# Altium PCB PWR_BOard_final.PcbDoc (part 1 of 2)
Units mm, origin at the board's own origin, x right, y up, seen from the top; angles counter-clockwise.
Board outline 72 x 52 mm, 2 copper layers (Top Layer, Bottom Layer); 122 components, 53 nets, 264 pads, 86 vias.
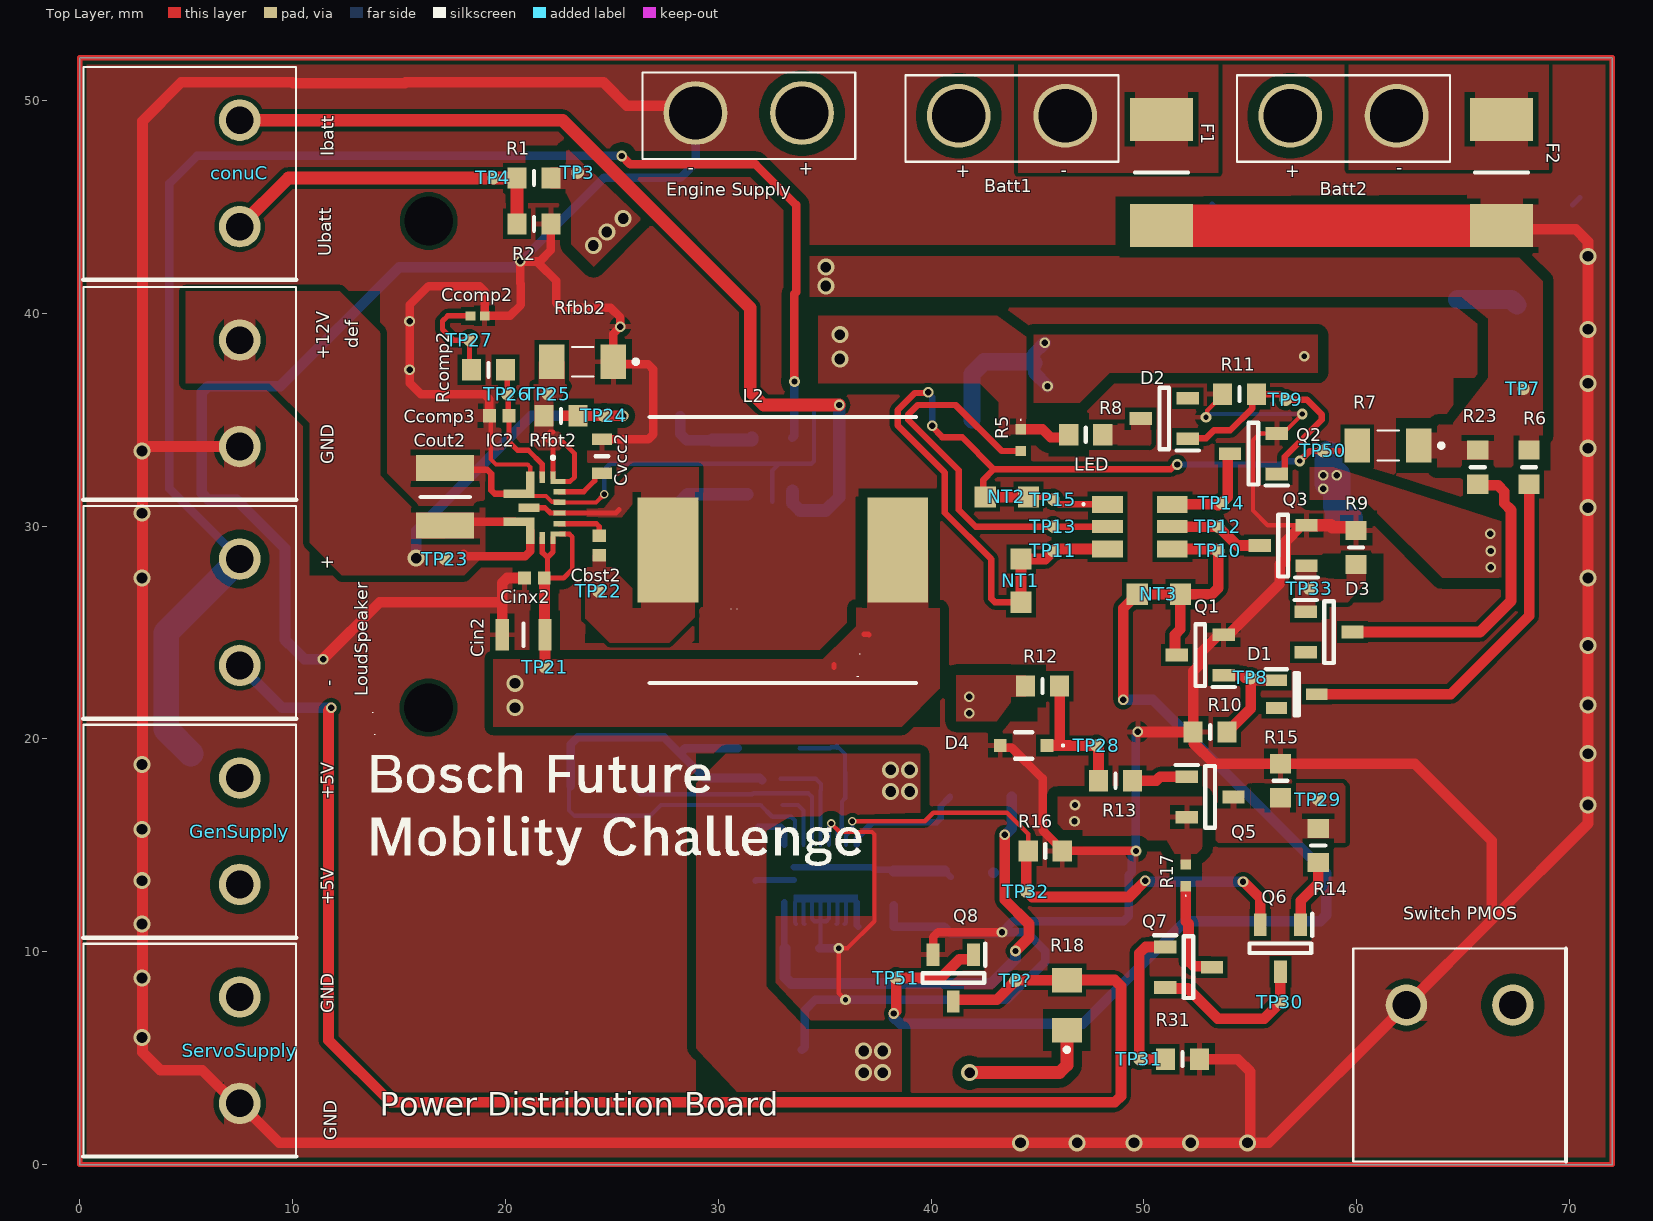
[diagram p0: Top Layer view]
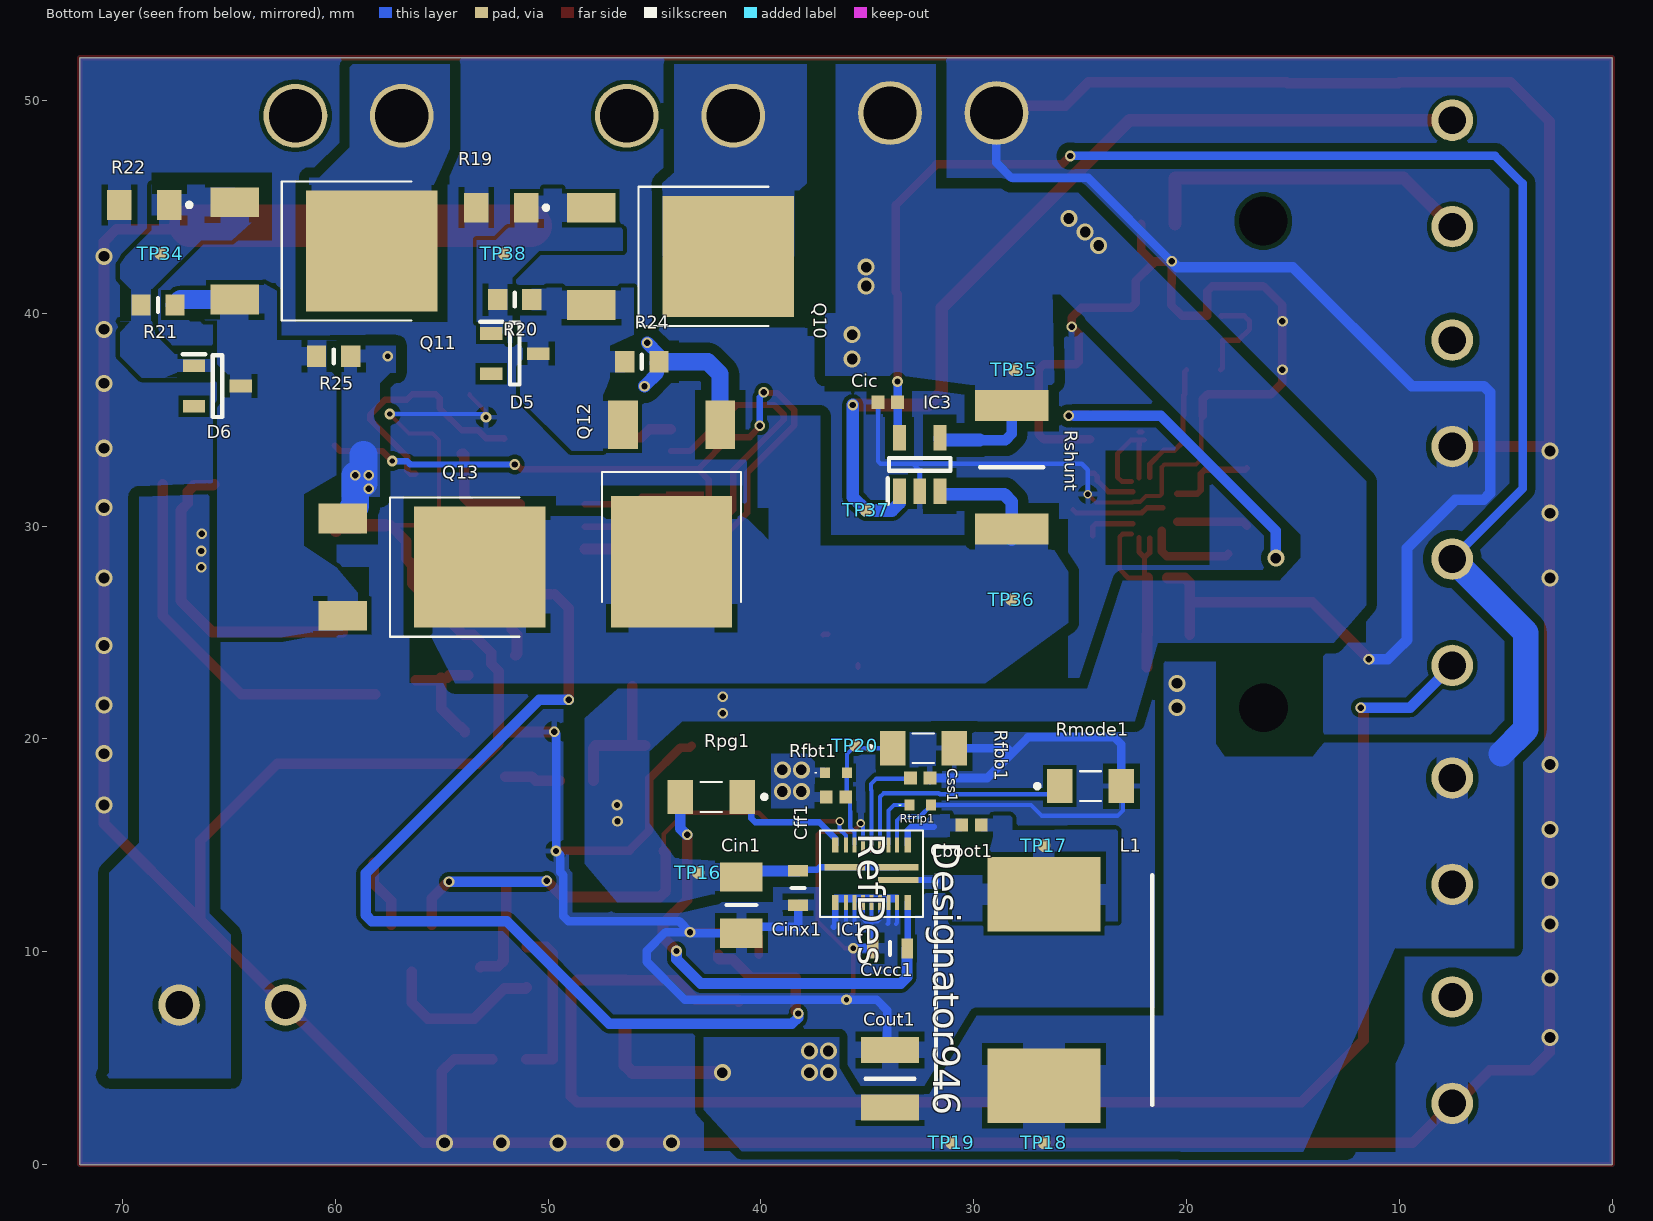
[diagram p1: Bottom Layer view, seen from below]
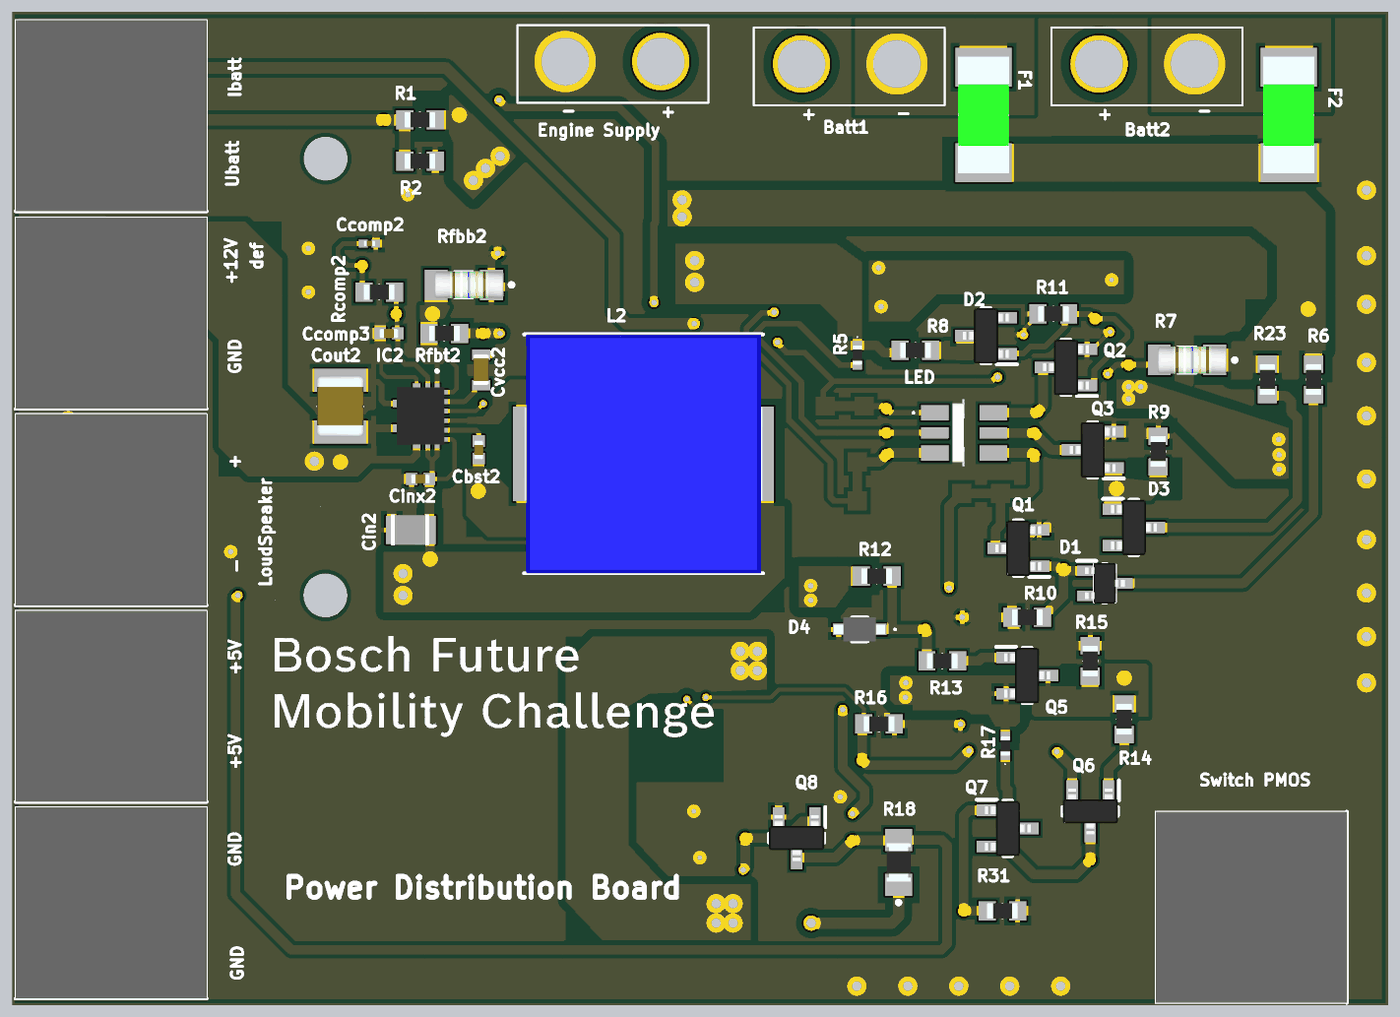
[diagram p3: 3D render of the assembled board from above, using the file's embedded part models]
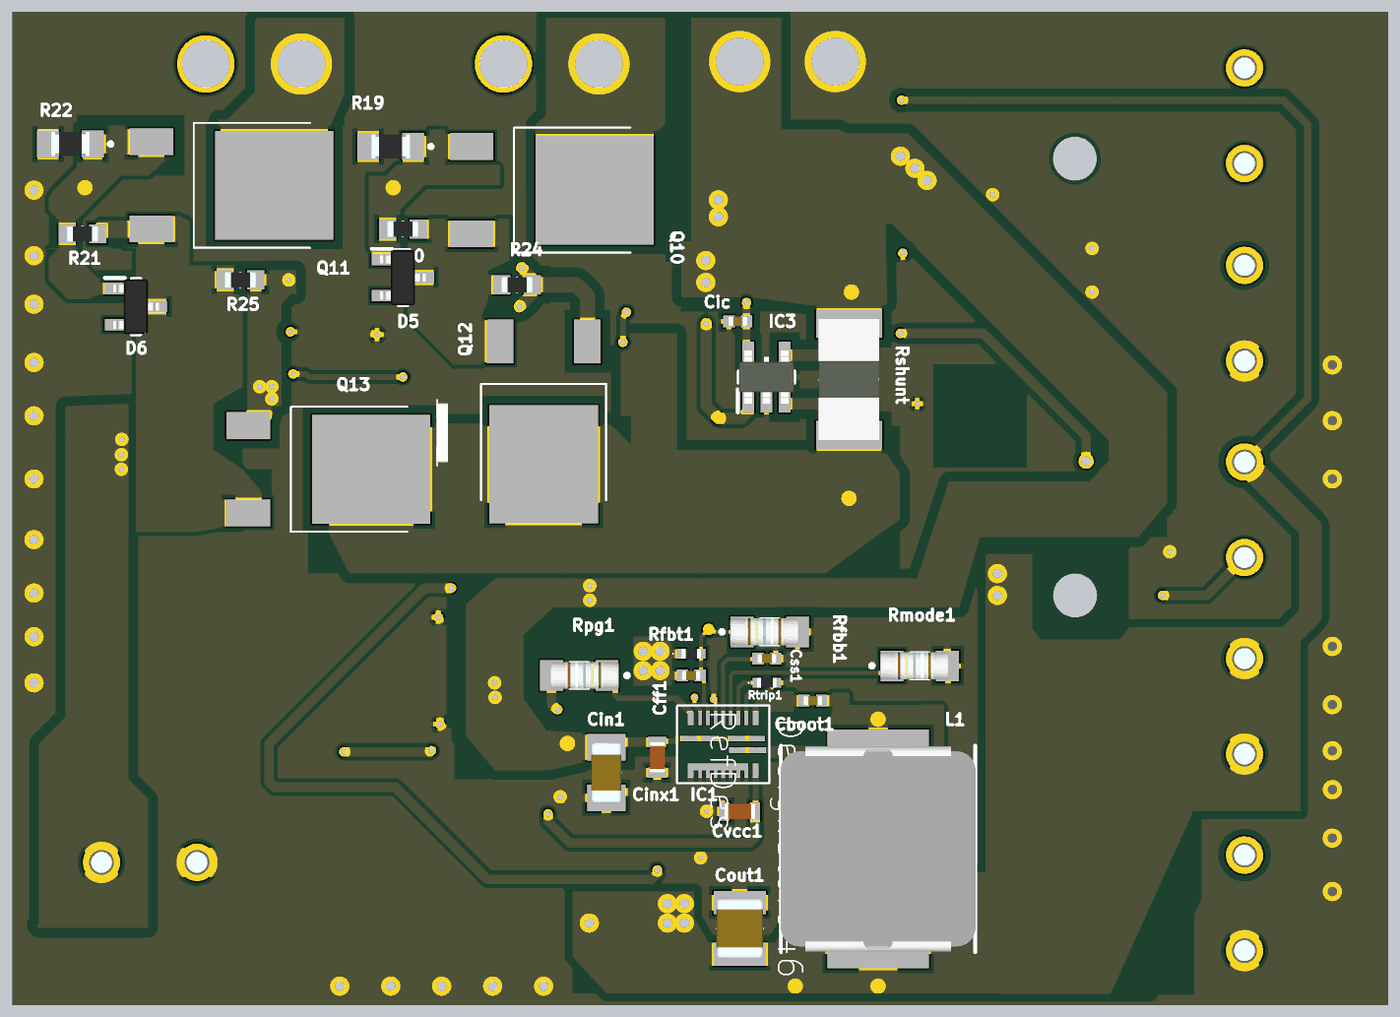
[diagram p4: 3D render of the assembled board from below, using the file's embedded part models]

## Layer stack, top to bottom
Top Solder: solder mask 0.0102, Solder Resist, Dk 3.5
Top Layer: signal copper 0.0356
Dielectric 1: dielectric 0.32, FR-4, Dk 4.8
Bottom Layer: signal copper 0.0356
Bottom Solder: solder mask 0.0102, Solder Resist, Dk 3.5

## Board outline
0,0 0,52 72,52 72,0

## Design rules (kind name [scope] priority, off if disabled: settings)
Clearance Clearance_5 [InNet('No Net')] p1: gap=2 ignorepadtopadclearanceinfootprint=FALSE
Clearance [InNet('out_Batt') vs InNet('GND')] p2: gap=0.5 ignorepadtopadclearanceinfootprint=FALSE except(0: Arc-Hole Track-Hole SMDPad-Hole THPad-Hole Via-Hole Fill-Hole Poly-Hole Region-Hole Text-Hole)
Clearance Clearance_6 [InNet('+5V') vs InNet('GND')] p3: gap=0.4 ignorepadtopadclearanceinfootprint=FALSE except(0: Arc-Hole Track-Hole SMDPad-Hole THPad-Hole Via-Hole Fill-Hole Poly-Hole Region-Hole Text-Hole)
Clearance Clearance_7 [InNet('Vout1') vs InNet('GND')] p4: gap=0.3 ignorepadtopadclearanceinfootprint=FALSE except(0: Arc-Hole Track-Hole SMDPad-Hole THPad-Hole Via-Hole Fill-Hole Poly-Hole Region-Hole Text-Hole)
Clearance Clearance_2 [InNet('Out_Batt1') vs InNet('GND')] p5: gap=0.5 ignorepadtopadclearanceinfootprint=FALSE except(0: Arc-Hole Track-Hole SMDPad-Hole THPad-Hole Via-Hole Fill-Hole Poly-Hole Region-Hole Text-Hole)
Clearance Clearance_3 [InNet('Out_Batt2') vs InNet('GND')] p6: gap=0.5 ignorepadtopadclearanceinfootprint=FALSE except(0: Arc-Hole Track-Hole SMDPad-Hole THPad-Hole Via-Hole Fill-Hole Poly-Hole Region-Hole Text-Hole)
Clearance Clearance_4 [InNet('Ubatt') vs InNet('GND')] p7: gap=0.5 ignorepadtopadclearanceinfootprint=FALSE except(0: Arc-Hole Track-Hole SMDPad-Hole THPad-Hole Via-Hole Fill-Hole Poly-Hole Region-Hole Text-Hole)
Clearance Clearance_8 [InNet('NetQ12_1') vs InNet('GND')] p8: gap=0.5 ignorepadtopadclearanceinfootprint=FALSE except(0: Arc-Hole Track-Hole SMDPad-Hole THPad-Hole Via-Hole Fill-Hole Poly-Hole Region-Hole Text-Hole)
Clearance Clearance_1 [All] p9: gap=0.2 ignorepadtopadclearanceinfootprint=FALSE except(0: Arc-Hole Track-Hole SMDPad-Hole THPad-Hole Via-Hole Fill-Hole Poly-Hole Region-Hole Text-Hole)
PolygonConnect [All] p1: connectstyle=Relief reliefconductorwidth=0.254 reliefentries=4 polygonreliefangle="90 Angle" airgapwidth=0.254
RoutingVias [All] p1: holewidth=0.3 width=0.5 viastyle="Through Hole" minholewidth=0.25 minwidth=0.4 maxholewidth=0.5 maxwidth=0.8
SolderMaskExpansion [All] p1: expansion=0.102 istentingtop=FALSE
UnpouredPolygon [All] p1: allowshelved=TRUE
Width [All] p1: maxlimit=5 minlimit=0.2 preferedwidth=0.6 minimp=50.000000 maximp=50.000000 favimp=50.000000
29 further rules are at their usual default settings.

## Classes and differential pairs
component class PWR_Board: +12V Batt1 Batt2 conuC D1 D2 D3 "Engine Supply" F1 F2 GenSupply LED NT1 NT2 NT3 Q1 Q2 Q3 R1 R2 R5 R6 R7 R8 R9 R10 R11 R23 ServoSupply TP3 TP4 TP7 TP8 TP9 TP10 TP11 TP12 TP13 TP14 TP15 TP33 TP50
component class circuit-On-Off+loudspeaker: D4 LoudSpeaker Q5 Q6 Q7 Q8 R12 R13 R14 R15 R16 R17 R18 R31 Sp TP28 TP29 TP30 TP31 TP32 TP51 TP?
component class buck_converter15A-5V: Cboot1 Cff1 Cin1 Cinx1 Cout1 Css1 Cvcc1 IC1 L1 Rfbb1 Rfbt1 Rmode1 Rpg1 Rtrip1 TP16 TP17 TP18 TP19 TP20
component class boost_converter_var2: Cbst2 Ccomp2 Ccomp3 Cin2 Cinx2 Cout2 Cvcc2 IC2 L2 Rcomp2 Rfbb2 Rfbt2 TP21 TP22 TP23 TP24 TP25 TP26 TP27
component class Balance_batt_protection: Cic D5 D6 IC3 Q10 Q11 Q12 Q13 R19 R20 R21 R22 R24 R25 Rshunt "Switch PMOS" TP34 TP35 TP36 TP37 TP38

## Components (designator, comment, footprint, x,y, rotation, side; value= is the part's Value field where it differs from the comment)
+12V "6.1V-7.4V" TB002V50002BE#1 7.516,33.735 r90 top (schematic designator BrainSupply)
Batt1 "7.4V" "PCBComponent_1 - duplicate" 46.298,49.276 r180 top
Batt2 "7.4V" "PCBComponent_1 - duplicate" 61.872,49.276 r180 top
Cboot1 "EMK105 B7104KVHF" CAPC1005X55N 30.104,15.957 r180 bottom value=100nF
Cbst2 "EMK105 B7104KVHF" CAPC1005X55N 24.407,29.083 r90 top value=100nF
Ccomp2 "GCM155R71E333K" CAPC0603X33N 18.692,39.878 r0 top value=39nF
Ccomp3 "GCM1555C1H820J*" CAPC1005X55N 19.708,35.179 r180 top value=82pF
Cff1 "C1005C0G1H220J" CAPC1005X55N 36.472,17.272 r180 bottom
Cic "C2012X7S1C106K" CAPC1005X55N 34.036,35.814 r0 bottom value="100 nF"
Cin1 "GCJ31CC71E106K" CAPC3216X200N 40.917,12.192 r270 bottom value=10uF
Cin2 "C2012X7S1C106K" CAPC2012X145N 20.851,24.892 r180 top value=10uF
Cinx1 "GCM188C71A225K" CAPC1608X80N 38.25,12.992 r270 bottom value=2.2uF
Cinx2 "EMK105 B7104KVHF" CAPC1005X55N 21.359,27.559 r180 top value=100nF
conuC "6.1V-7.4V" TB002V50002BE#1 7.516,44.069 r90 top
Cout1 "EMK325ABJ107MM-T" CAPC3225X270N 33.932,4.035 r90 bottom value=100uF
Cout2 "CKG57KX7R1E476K" CAPC3225X270N 17.168,31.369 r90 top value=47uF
Css1 "C1608X7R1H154K" CAPC1005X55N 32.512,18.161 r180 bottom value=120nF
Cvcc1 "GCM188C71A225K" CAPC1608X80N 33.932,10.16 r0 bottom value=2.2uF
Cvcc2 "GCM188C71A225K" CAPC1608X80N 24.534,33.274 r90 top value=2.2uF
D1 "Vbr=6V2" SOT65P210X110-3N 57.173,22.098 r0 top
D2 "BZX84W-C15F" SOT95P230X110-3N 50.95,35.052 r180 top
D3 "Vbr=6V2" SOT95P230X110-3N 58.697,25.019 r0 top
D4 "PZU6.2B2A-QX" PZU62B2AQX 44.346,19.685 r180 top
D5 "SZBZX84C18ET1G" SOT95P230X110-3N 51.562,38.1 r180 bottom
D6 "SZBZX84C18ET1G" SOT95P230X110-3N 65.532,36.576 r180 bottom
"Engine Supply" "7.4V" "PCBComponent_1 - duplicate" 33.932,49.403 r180 top
F1 "0451015.MRL" FUSC6127X294N 50.823,46.609 r270 top
F2 "0451015.MRL" FUSC6127X294N 66.802,46.609 r270 top
GenSupply "6.1V-7.4V" TB002V50002BE#1 7.516,13.161 r90 top
IC1 "TPS548A28RWWR" RWW0021A 34.801,13.67 r270 bottom value=Value
IC2 "TPS61288RQQR" TPS61288RQQR 21.359,30.861 r270 top
IC3 "INA180A2QDBVRQ1" SOT95P280X145-5N 32.535,32.893 r90 bottom
L1 "IHLP4040DZERR47M11" IHLP4040DZERR47M11 26.693,8.2 r90 bottom value=470nH
L2 "DR127-3R3-R" INDPM125125X800N 33.034,28.873 r180 top value=3.3uH
LED "SMLVN6RGB1U1" SMLVN6RGB1U1 49.807,29.972 r90 top
LoudSpeaker "5V" TB002V50002BE#1 7.516,23.448 r90 top
NT1 "NT" NetTie 44.219,27.432 r270 top net-tie
NT2 "NT" NetTie 43.561,31.369 r0 top net-tie
NT3 "NT" NetTie 50.696,26.797 r180 top net-tie
Q1 "BC846B" SOT95P230X110-3N 52.644,23.937 r180 top
Q2 "BC846B" SOT95P230X110-3N 55.141,33.401 r180 top
Q3 "BC846B" SOT95P230X110-3N 56.538,29.083 r180 top
Q5 "BC856B" SOT95P230X110-3N 53.109,17.272 r0 top
Q6 "BC846B" SOT95P230X110-3N 56.411,10.16 r270 top
Q7 "BSS138BK-215" SOT95P230X110-3N 52.093,9.271 r0 top
Q8 "BSS138BK-215" SOT95P230X110-3N 41.044,8.763 r270 top
Q10 "SQD50P04-09L_GE3" SQD50P0409L_GE3 45.746,42.672 r270 bottom
Q11 "SQD50P04-09L_GE3" SQD50P0409L_GE3 62.51,42.926 r270 bottom
Q12 "SQD50P04-09L_GE3" SQD50P0409L_GE3 44.196,32.538 r0 bottom
Q13 "SQD50P04-09L_GE3" SQD50P0409L_GE3 57.43,28.067 r270 bottom
R1 "MCR03..PFX1051" RESC1608X55N 21.336,46.355 r0 top value=1.05k
R2 "MCR03...PFX7680" RESC1608X55N 21.336,44.196 r0 top value=620
R5 "RK73H1JPT..2150F" ERJ2RKD1004X 44.219,34.036 r270 top
R6 "MCR03..PFX1000" RESC1608X55N 68.095,32.766 r270 top value=100
R7 "SMM0204 50 150R 1 %" SMM02040D1501BB300 61.745,33.782 r180 top value=150
R8 "MCR03..PFX1000" RESC1608X55N 47.267,34.29 r0 top value=100
R9 "MCR03..PFX1002" RESC1608X55N 59.967,28.994 r90 top value=10K
R10 "MCR03..PFX1002" RESC1608X55N 53.109,20.32 r180 top value=10K
R11 "MCR03..PFX1002" RESC1608X55N 54.483,36.195 r180 top value=10K
R12 "MCR03..PFX1002" RESC1608X55N 45.235,22.479 r0 top value=10K
R13 "MCR03..PFX1002" RESC1608X55N 48.664,18.034 r0 top value=10K
R14 "MCR03..PFX1002" RESC1608X55N 58.189,14.986 r270 top value=10K
R15 "MCR03..PFX1002" RESC1608X55N 56.411,18.034 r90 top value=10K
R16 "MCR03..PFX1002" RESC1608X55N 45.362,14.732 r0 top value=10K
R17 "8909013012" ERJ2RKD1004X 51.966,13.589 r90 top value=30K
R18 "MCR03..PFX1002" ERJP06D1000V 46.378,7.493 r90 top value=1K
R19 "MCR03..PFX1002" ERJP06D1000V 52.197,44.958 r0 bottom value=4.22k
R20 "MCR03..PFX1002" RESC1608X55N 51.562,40.64 r0 bottom value=46.4k
R21 "MCR03..PFX1002" RESC1608X55N 68.326,40.386 r0 bottom value=46.4k
R22 "MCR03..PFX1002" ERJP06D1000V 68.961,45.085 r0 bottom value=4.22k
R23 "MCR03..PFX1000" RESC1608X55N 65.682,32.766 r270 top value=100
R24 "MCR03..PFX1002" RESC1608X55N 45.593,37.719 r180 bottom value=46.4k
R25 "MCR03..PFX1002" RESC1608X55N 60.071,37.973 r180 bottom value=46.4k
R31 "MCR03..PFX1002" RESC1608X55N 51.816,4.953 r0 top value=10K
Rcomp2 "SMM0204 50 34K 1 %" RESC1608X55N 19.2,37.338 r0 top value=34k
Rfbb1 "SMM0204 50 10K 1 %" SMM02040D1501BB300 32.639,19.558 r180 bottom value=10k
Rfbb2 "SMM0204 50 48K7 1 %" SMM02040D1501BB300 23.899,37.719 r180 top value=48.7k
Rfbt1 "SMM0204 50 73K2 1 %" ERJ2RKD1004X 36.472,18.415 r180 bottom value=73.2k
Rfbt2 "SMM0204 50 931K 1 %" RESC1608X55N 22.606,35.179 r0 top value=931k
Rmode1 "SMM0204 50 30K1 1 %" SMM02040D1501BB300 24.788,17.78 r180 bottom value=30.1k
Rpg1 "SMM0204 50 30K1 1 %" SMM02040D1501BB300 42.06,17.272 r0 bottom value=30.1k
Rshunt "WSLP25122L500FEA" RESC6432X89N 28.217,32.766 r90 bottom
Rtrip1 "SMM0204 50 7K32 1 %" ERJ2RKD1004X 32.512,16.891 r180 bottom value=7.32k
ServoSupply "5V" TB002V50002BE#1 7.516,2.874 r90 top
"Switch PMOS" "5V" TB002V50002BE#2 67.333,7.493 r180 top
TP3 "TP" TEST_POINT0.5X0.5#1 23.391,46.608 r90 top
TP4 "TP" TEST_POINT0.5X0.5#1 19.431,46.355 r90 top
TP7 "TP" TEST_POINT0.5X0.5#1 67.818,36.449 r90 top
TP8 "TP" TEST_POINT0.5X0.5#1 55.014,22.86 r90 top
TP9 "TP" TEST_POINT0.5X0.5#1 56.665,35.941 r90 top
TP10 "TP" TEST_POINT0.5X0.5#1 53.49,28.829 r90 top
TP11 "TP" TEST_POINT0.5X0.5#1 45.743,28.829 r90 top
TP12 "TP" TEST_POINT0.5X0.5#1 53.49,29.972 r90 top
TP13 "TP" TEST_POINT0.5X0.5#1 45.743,29.972 r90 top
TP14 "TP" TEST_POINT0.5X0.5#1 53.664,31.081 r90 top
TP15 "TP" TEST_POINT0.5X0.5#1 45.743,31.242 r90 top
TP16 "TP" TEST_POINT0.5X0.5#2 42.949,13.716 r90 top
TP17 "TP" TEST_POINT0.5X0.5#2 26.693,14.986 r90 top
TP18 "TP" TEST_POINT0.5X0.5#1 26.693,1.016 r90 bottom
TP19 "TP" TEST_POINT0.5X0.5#1 31.03,1.016 r90 bottom
TP20 "TP" TEST_POINT0.5X0.5#2 35.56,19.685 r90 top
TP21 "TP" TEST_POINT0.5X0.5#1 21.867,23.368 r90 top
TP22 "TP" TEST_POINT0.5X0.5#1 24.384,26.924 r90 top
TP23 "TP" TEST_POINT0.5X0.5#1 17.168,28.448 r90 top
TP24 "TP" TEST_POINT0.5X0.5#1 24.638,35.179 r90 top
TP25 "TP" TEST_POINT0.5X0.5#1 21.994,36.195 r90 top
TP26 "TP" TEST_POINT0.5X0.5#1 20.089,36.195 r90 top
TP27 "TP" TEST_POINT0.5X0.5#1 18.311,38.735 r90 top
TP28 "TP" TEST_POINT0.5X0.5#1 47.775,19.685 r90 top
TP29 "TP" TEST_POINT0.5X0.5#1 58.189,17.145 r90 top
TP30 "TP" TEST_POINT0.5X0.5#1 56.411,7.62 r90 top
TP31 "TP" TEST_POINT0.5X0.5#1 49.784,4.953 r90 top
TP32 "TP" TEST_POINT0.5X0.5#1 44.473,12.827 r90 top
TP33 "TP" TEST_POINT0.5X0.5#1 57.785,27.051 r90 top
TP34 "TP" TEST_POINT0.5X0.5#1 68.199,42.799 r90 bottom
TP35 "TP" TEST_POINT0.5X0.5#2 28.09,37.338 r90 top
TP36 "TP" TEST_POINT0.5X0.5#2 28.217,26.543 r90 top
TP37 "TP" TEST_POINT0.5X0.5#2 35.052,30.734 r90 top
TP38 "TP" TEST_POINT0.5X0.5#1 52.07,42.799 r90 bottom
TP50 "TP" TEST_POINT0.5X0.5#1 58.42,33.528 r90 top
TP51 "TP" TEST_POINT0.5X0.5#1 38.354,8.763 r90 top
TP? "TP" TEST_POINT0.5X0.5#1 43.965,8.636 r90 top

## Footprints (in the part's own frame and the unit in brackets; to place one, negate y for a bottom-side part, rotate by r counter-clockwise, add the part's x,y. Pads: shape width x height; smd on the part's side, far side on the other; paste and mask are expansions set on the pad)
CAPC0603X33N [mm]
  rect 0.46x0.42 smd: 1(-0.33,0) 2(0.33,0)
  body extent -0.3,-0.15 0.3,0.15, height 0.33
CAPC1005X55N [mm]
  rect 0.6x0.62 smd: 1(-0.46,0) 2(0.46,0)
  body extent -0.5,-0.25 0.5,0.25, height 0.55
CAPC1608X80N [mm]
  rect 0.54x0.94 smd: 1(-0.8,0) 2(0.8,0)
  silkscreen extent 0,-0.3 0,0.3, body extent -0.8,-0.4 0.8,0.4, height 0.8
CAPC2012X145N [mm]
  rect 0.62x1.47 smd: 1(-1,0) 2(1,0)
  silkscreen extent 0,-0.53 0,0.53, body extent -0.96,-0.8 1.04,0.8, height 1.25
CAPC3216X200N [mm]
  rect 1.38x2.01 smd: 1(-1.32,0) 2(1.32,0)
  silkscreen extent 0,-0.7 0,0.7, body extent -1.6,-0.8 1.6,0.8, height 2
CAPC3225X270N [mm]
  rect 1.22x2.72 smd: 1(-1.35,0) 2(1.35,0)
  silkscreen extent 0,-1.15 0,1.15, body extent -1.6,-1.25 1.6,1.25, height 2.7
ERJ2RKD1004X [mm]
  rect 0.475x0.5 smd: 1(-0.512,0) 2(0.512,0)
  silkscreen extent -0.97,-0.03 -0.93,0.03, body extent -0.5,-0.25 0.5,0.25, height 0.35
ERJP06D1000V [mm]
  rect 1.15x1.4 smd: 1(-1.175,0) 2(1.175,0)
  silkscreen extent -2.2,-0.1 -2,0.1, body extent -1,-0.63 1,0.63, height 0.6
FUSC6127X294N [mm]
  rect 2.02x2.95 smd: 1(-2.5,0) 2(2.5,0)
  silkscreen extent 0,-1.24 0,1.24, body extent -3.05,-1.35 3.05,1.35, height 2.94
IHLP4040DZERR47M11 [mm]
  rect 3.49x5.3 smd: 1(-4.5,0) 2(4.5,-0.001)
  silkscreen extent -5.4,-5.08 5.4,5.08, body extent -5.36,-5.11 5.36,5.11, height 3.88
INDPM125125X800N [mm]
  rect 2.85x4.95 smd: 1(-5.4,0) 2(5.4,0)
  silkscreen extent -6.25,-6.25 6.25,6.25, body extent -6.25,-6.25 6.25,6.25, height 8
NetTie [mm]
  rect 1x1 smd paste-10 mask-10: 1(-1.016,0) 2(1.016,0)
  Top Layer region: -0.889,-0.254 0.889,-0.254 0.889,0.254 -0.889,0.254
"PCBComponent_1 - duplicate" [mm]
  round 3 hole 2.5: 1(0,0) 2(5,0)
  silkscreen extent -2.5,-1.91 7.5,2.16
PZU62B2AQX [mm]
  rect 0.6x0.6 smd: 1(-1.1,0) 2(1.1,0)
  silkscreen extent -1.9,-0.63 0.4,0.63, body extent -1.34,-0.63 1.34,0.63, height 1.2
RESC1608X55N [mm]
  rect 0.9x1 smd: 1(-0.8,0) 2(0.8,0)
  silkscreen extent 0,-0.33 0,0.33, body extent -0.8,-0.4 0.8,0.4, height 0.45
RESC6432X89N [mm]
  rect 1.45x3.45 smd: 1(-2.9,0) 2(2.9,0)
  silkscreen extent 0,-1.49 0,1.49, body extent -3.17,-1.59 3.17,1.59, height 0.64
RWW0021A [mm]
  rect 0.7x0.3 smd paste+0 mask+0.051: 1(-1.35,1.7) 9(-1.35,-1.7) 11(1.35,-1.7) 19(1.35,1.7)
  rect 0.7x0.2 smd paste+0 mask+0.051: 2(-1.35,1.2) 3(-1.35,0.8) 4(-1.35,0.4) 5(-1.35,0) 6(-1.35,-0.4) 7(-1.35,-0.8) 8(-1.35,-1.2) 12(1.35,-1.2) 13(1.35,-0.8) 14(1.35,-0.4) 15(1.35,0) 16(1.35,0.4) 17(1.35,0.8) 18(1.35,1.2)
  rect 0.3x1.9 smd paste-0.937 mask+0.051: 10(-0.3,-1.25) 20(0.3,1.25) 21(-0.3,1.25)
  Top Layer region: 1,1.261 1,-1.74 1.351,-1.74 1.351,1.261
  silkscreen extent -2.03,-2.41 2.03,2.41, body extent 0,0 0.25,0.25, height 0.25
SMLVN6RGB1U1 [mm]
  rect 0.8x1.45 smd: 1(1.05,1.525) 3(-1.05,1.525) 4(-1.05,-1.525) 6(1.05,-1.525)
  rect 0.6x1.45 smd: 2(0,1.525) 5(0,-1.525)
  silkscreen extent 1,2.6 1.1,2.7, body extent -1.75,-0.02 1.75,0.61, height 1.4
SMM02040D1501BB300 [mm]
  rect 1.2x1.6 smd: 1(-1.175,0) 2(1.725,0)
  silkscreen extent -2.32,-0.7 0.77,0.7, body extent -1.8,-0.7 1.8,0.7, height 1.4
SOT65P210X110-3N [mm]
  rect 1x0.55 smd: 1(-0.95,0.65) 2(-0.95,-0.65) 3(0.95,0)
  silkscreen extent -1.45,-1 0.1,1.17, body extent -1.05,-1.05 1.05,1.05, height 0.95
SOT95P230X110-3N [mm]
  rect 1.05x0.6 smd: 1(-1.1,0.95) 2(-1.1,-0.95) 3(1.1,0)
  silkscreen extent -1.63,-1.45 0.23,1.5, body extent -1.2,-1.45 1.2,1.45, height 0.95
SOT95P280X145-5N [mm]
  rect 1.2x0.6 smd: 1(-1.25,0.95) 2(-1.25,0) 3(-1.25,-0.95) 4(1.25,-0.95) 5(1.25,0.95)
  silkscreen extent -1.85,-1.45 0.3,1.5, body extent -1.4,-1.45 1.4,1.45, height 1.2
SQD50P0409L_GE3 [mil]
  rect 55x90 smd: 1(-90,-87.28) 3(90,-87.28)
  rect 224.02x243.31 smd: 2(0,166.02)
  silkscreen extent -129,0 129,240
TB002V50002BE#1 [mm]
  round 1.95 hole 1.3: 1(0,0) 2(5,0)
  silkscreen extent -2.5,-2.65 7.5,7.35, body extent -2.5,-2.65 7.5,7.35, height 8.1
TB002V50002BE#2 [mm]
  round 1.95 hole 1.3: 1(5,0) 2(0,0)
  silkscreen extent -2.5,-2.65 7.5,7.35, body extent -2.5,-2.65 7.5,7.35, height 8.1
TEST_POINT0.5X0.5#1 [mm]
  round 0.6 smd paste-1: TP?(0,0)
  body extent -0.3,-0.3 0.3,0.3, height 0.03
TEST_POINT0.5X0.5#2 [mm]
  round 0.6 smd far side paste-1: TP?(0,0)
  body extent -0.3,-0.3 0.3,0.3, height 0.03
TPS61288RQQR [mm]
  rect 0.575x0.25 smd: 1(-1.413,0.875) 7(1.413,0.875)
  rect 0.55x0.25 smd: 2(-1.425,0.375) 6(1.425,0.375)
  rect 1.25x0.4 smd: 3(-1.075,-0.2) 5(1.075,-0.2)
  rect 0.4x1 smd: 4(0,-0.25)
  rect 0.25x0.55 smd: 8(0.75,1.175) 9(0.25,1.175) 10(-0.25,1.175) 11(-0.75,1.175)
  rect 0.225x0.45 smd: 12(-1.237,1.225) 15(1.237,1.225)
  rect 0.4x1.05 smd: 13(-0.65,-0.925) 14(0.65,-0.925)
  silkscreen extent -2.4,0.83 -2.3,0.92, body extent -1.5,-1.25 1.5,1.25, height 1

## Part data
+12V conuC GenSupply LoudSpeaker ServoSupply "Switch PMOS": library part "Header 2", "Header, 2-Pin", LatestRevisionDate=17-Jul-2002, LatestRevisionNote="Re-released for DXP Platform.", Publisher="Altium Limited"
Batt1 Batt2 "Engine Supply": library part "Header 2", "2 Holes", LatestRevisionDate=17-Jul-2002, LatestRevisionNote="Re-released for DXP Platform.", Publisher="Altium Limited"
Cboot1: library part EMK107B7104KA-T, "EMK107B7104KA-T", Manufacturer Name="Taiyo Yuden", Manufacturer Part Number=EMK107B7104KA-T, PackageReference=EMK107B7104KA-T
Cbst2 Ccomp2 Ccomp3 Cic Cin2 Cinx2 Cout2 Cvcc2: library part C3216X6S1V106K160AC, "C3216X6S1V106K16", Manufacturer Name=TDK, Manufacturer Part Number=C3216X6S1V106K160AC, PackageReference=C3216X6S1V106K160AC
Cff1: library part C0402C240J3GACTU, "C0402C240J3GACTU", Manufacturer Name=Kemet, C1005C0G1H220J=22pF, Manufacturer Part Number=C0402C240J3GACTU, PackageReference=C0402C240J3GACTU
Cin1: library part GRM31CR71E106KA12L, "GRM31CR71E106KA1", Manufacturer Name=MuRata, Manufacturer Part Number=GRM31CR71E106KA12L, PackageReference=GRM31CR71E106KA12L
Cinx1: library part C1608X7R1A225K080AC, "C1608X7R1A225K08", Manufacturer Name=TDK, Manufacturer Part Number=C1608X7R1A225K080AC, PackageReference=C1608X7R1A225K080AC
Cout1: library part GENERIC_CAPACITOR, "CUSTOM1", Manufacturer Name=CUSTOM, Manufacturer Part Number=GENERIC_CAPACITOR, PackageReference=CUSTOM
Css1: library part GRM155R61A124KE19D, "GRM155R61A124KE1", Manufacturer Name=MuRata, Manufacturer Part Number=GRM155R61A124KE19D, PackageReference=GRM155R61A124KE19D
Cvcc1: library part GRM188R71A225KE15D, "GRM188R71A225KE1", Manufacturer Name=MuRata, Manufacturer Part Number=GRM188R71A225KE15D, PackageReference=GRM188R71A225KE15D
D1 D3 D5 D6: library part BZX84W-C15F, "Zener Diode", Manufacturer_Name=Nexperia, Mouser Part Number=771-BZX84W-C15F, Arrow Part Number=BZX84W-C15F, Arrow Price/Stock=https://www.arrow.com/en/products/bzx84w-c15f/nexperia, Datasheet Link=https://assets.nexperia.com/documents/data-sheet/BZX84W_SER.pdf, Height=1.1mm, Manufacturer_Part_Number=BZX84W-C15F, Mouser Price/Stock=https://www.mouser.co.uk/ProductDetail/Nexperia/BZX84W-C15F?qs=MLItCLRbWsyz6DhKLlcnOA%3D%3D
D2: "Zener Diode", Manufacturer_Name=Nexperia, Mouser Part Number=771-BZX84W-C15F, Arrow Part Number=BZX84W-C15F, Arrow Price/Stock=https://www.arrow.com/en/products/bzx84w-c15f/nexperia, Datasheet Link=https://assets.nexperia.com/documents/data-sheet/BZX84W_SER.pdf, Height=1.1mm, Manufacturer_Part_Number=BZX84W-C15F, Mouser Price/Stock=https://www.mouser.co.uk/ProductDetail/Nexperia/BZX84W-C15F?qs=MLItCLRbWsyz6DhKLlcnOA%3D%3D
D4: "Zener Diode", Manufacturer_Name=Nexperia, Datasheet Link=https://assets.nexperia.com/documents/data-sheet/PZUXBA-Q_SER.pdf, Height=1.1mm, Manufacturer_Part_Number=PZU6.2B2A-QX
F1 F2: "Fuse", Manufacturer_Name=LITTELFUSE, Mouser Part Number=576-0451015.MRL, Arrow Part Number=0451015.MRL, Arrow Price/Stock=https://www.arrow.com/en/products/0451015.mrl/littelfuse?region=europe, Datasheet Link=http://www.littelfuse.com/~/media/electronics/datasheets/fuses/littelfuse_fuse_451_453_datasheet.pdf.pdf, Height=2.94mm, Manufacturer_Part_Number=0451015.MRL, Mouser Price/Stock=https://www.mouser.co.uk/ProductDetail/Littelfuse/0451015.MRL?qs=bpnLQM2ZShzZ87Rm5CvzLA%3D%3D
IC1: "No Description Available", Manufacturer="Texas Instruments", Copyright="Copyright (C) 2018 Accelerated Designs. All rights reserved", Manufacturer_Name="Texas Instruments", Manufacturer_Part_Number=TPS548A28RWWR, PartNumber=TPS548A28RWWR, RefDes=RefDes, TYPE=TYPE
IC2: "Integrated Circuit", Manufacturer_Name="Texas Instruments", Mouser Part Number=595-TPS61288RQQR, Arrow Part Number=TPS61288RQQR, Arrow Price/Stock=https://www.arrow.com/en/products/tps61288rqqr/texas-instruments?region=nac, Datasheet Link=https://www.ti.com/lit/ds/symlink/tps61288.pdf?ts=1609351344517&ref_url=https%253A%252F%252Fwww.ti.com%252Fpower-management%252Fnon-isolated-dc-dc-switching-regulators%252Fstep-up-boost%252Fboost-converters-integrated-switch%252Fproducts.html, Height=1mm, Manufacturer_Part_Number=TPS61288RQQR, Mouser Price/Stock=https://www.mouser.co.uk/ProductDetail/Texas-Instruments/TPS61288RQQR?qs=eP2BKZSCXI7ZX8saYJkaIw%3D%3D
IC3: "Attenuator or Isolator", Manufacturer_Name="Texas Instruments", Mouser Part Number=595-INA180A2QDBVRQ1, Arrow Part Number=INA180A2QDBVRQ1, Arrow Price/Stock=https://www.arrow.com/en/products/ina180a2qdbvrq1/texas-instruments?region=nac, Datasheet Link=http://www.ti.com/lit/gpn/INA180-Q1, Height=1.45mm, Manufacturer_Part_Number=INA180A2QDBVRQ1, Mouser Price/Stock=https://www.mouser.co.uk/ProductDetail/Texas-Instruments/INA180A2QDBVRQ1?qs=9r4v7xj2LnnPs8OEye75UA%3D%3D
L1: "IHLP4040DZERR47M", Manufacturer Name=Vishay-Dale, Manufacturer Part Number=IHLP4040DZERR47M11, PackageReference=IHLP4040DZERR47M11
L2: library part Inductor, "Inductor", Code_IEC=1005, Code_JEITA=0402, LatestRevisionDate=29-May-2009, LatestRevisionNote="IPC-7351 Footprint Added.", PackageDescription="Chip Inductor", PackageReference=0402-A, Published=8-Jun-2000, Publisher="Altium Limited"
LED: "LED", Manufacturer_Name="ROHM Semiconductor", Mouser Part Number=755-SMLVN6RGB1U1, Arrow Part Number=SMLVN6RGB1U1, Arrow Price/Stock=https://www.arrow.com/en/products/smlvn6rgb1u1/rohm-semiconductor, Datasheet Link=https://datasheet.datasheetarchive.com/originals/distributors/DKDS-18/357153.pdf, Height=0.7mm, Manufacturer_Part_Number=SMLVN6RGB1U1, Mouser Price/Stock=https://www.mouser.co.uk/ProductDetail/ROHM-Semiconductor/SMLVN6RGB1U1?qs=EAJhGnHnT01cATtJAsda5w%3D%3D
NT1 NT2 NT3: library part NetTie, "Net Tie SMD"
Q1 Q2 Q3 Q6: library part NPN, "NPN Bipolar Transistor", Code_JEDEC=TO-226-AA, LatestRevisionDate=17-Jul-2002, LatestRevisionNote="Re-released for DXP Platform.", PackageDescription="TO, Flat Index; 3 In-Line, Axial Leads; Body Dia. 4.8mm; Leads 0.55 x 0.51 mm (max)", PackageReference=TO-226-AA, Published=8-Jun-2000, Publisher="Altium Limited"
Q5: library part PNP, "PNP Bipolar Transistor", LatestRevisionDate=29-May-2009, LatestRevisionNote="IPC-7351 Footprint Added.", PackageDescription="3-Pin SOT-23 Package 0.95 mm Pitch, 2.4 mm Lead Span", PackageReference=SOT-23B, PackageVersion=Aug-1999, Published=8-Jun-2000, Publisher="Altium Limited"
Q7 Q8: "MOSFET (N-Channel)", Manufacturer_Name=Nexperia, Datasheet Link=https://assets.nexperia.com/documents/data-sheet/BSS138BK.pdf, Height=1.1mm, Manufacturer_Part_Number=BSS138BK-215
Q10 Q11 Q12 Q13: "MOSFET (P-Channel)", Manufacturer_Name=Vishay, Mouser Part Number=78-SQD50P04-09L_GE3, Datasheet Link=https://www.vishay.com/docs/65018/sqd50p04.pdf, Height=2.28mm, Manufacturer_Part_Number=SQD50P04-09L_GE3, Mouser Price/Stock=https://www.mouser.co.uk/ProductDetail/Vishay-Siliconix/SQD50P04-09L_GE3?qs=jHkklCh7amiWGBpNycQWww%3D%3D
R1 R2 R5 R6 R7 R8 R9 R10 R11 R12 R13 R14 R15 R16 R17 R18 R19 R20 R21 R22 R23 R24 R25 R31 Rcomp2 Rfbb2 Rfbt2: library part Res1, "Resistor", LatestRevisionDate=17-Jul-2002, LatestRevisionNote="Re-released for DXP Platform.", PackageDescription="Axial Device, Thru-Hole; 2 Leads; 0.3 in Pin Spacing", PackageReference=AXIAL-0.3, Published=8-Jun-2000, Publisher="Altium Limited"
  R5: ERJ2RKF2150..=215
Rfbb1: library part CRCW040210K0FKED, "CRCW040210K0FKED", Manufacturer Name=Vishay-Dale, Manufacturer Part Number=CRCW040210K0FKED, PackageReference=CRCW040210K0FKED
Rfbt1: library part CRCW040273K2FKED, "CRCW040273K2FKED", Manufacturer Name=Vishay-Dale, Manufacturer Part Number=CRCW040273K2FKED, PackageReference=CRCW040273K2FKED
Rmode1 Rpg1: library part CRCW040230K1FKED, "CRCW040230K1FKED", Manufacturer Name=Vishay-Dale, Manufacturer Part Number=CRCW040230K1FKED, PackageReference=CRCW040230K1FKED
Rshunt: "Resistor", Manufacturer_Name=Vishay, Mouser Part Number=71-WSLP25122L500FEA, Arrow Part Number=WSLP25122L500FEA, Arrow Price/Stock=https://www.arrow.com/en/products/wslp25122l500fea/vishay, Datasheet Link=https://componentsearchengine.com/Datasheets/1/WSLP25122L500FEA.pdf, Height=0.889mm, Manufacturer_Part_Number=WSLP25122L500FEA, Mouser Price/Stock=https://www.mouser.co.uk/ProductDetail/Vishay-Dale/WSLP25122L500FEA?qs=%2FCXICPRLKg%252BpcyljWM%2FHhA%3D%3D
Rtrip1: library part CRCW04027K32FKED, Manufacturer Name=Vishay-Dale, Manufacturer Part Number=CRCW04027K32FKED, PackageReference=CRCW04027K32FKED
TP3 TP4 TP7 TP8 TP9 TP10 TP11 TP12 TP13 TP14 TP15 TP16 TP17 TP18 TP19 TP20 TP21 TP22 TP23 TP24 TP25 TP26 TP27 TP28 TP29 TP30 TP31 TP32 TP33 TP34 TP35 TP36 TP37 TP38 TP50 TP51 TP?: library part TEst_Point_0.5x0.5

## Free pads (board coordinates)
  round 1.524 hole 2.3 unplated: 2(16.383,21.463) 2(16.396,44.323)

## Via types
v1: diameter 0.8, hole 0.5, Top Layer to Bottom Layer, 43 vias
v2: diameter 0.5, hole 0.3, Top Layer to Bottom Layer, 34 vias
v3: diameter 0.5, hole 0.25, Top Layer to Bottom Layer, 6 vias
v4: diameter 0.4, hole 0.25, Top Layer to Bottom Layer, 3 vias

## Nets (pads, with @x,y where several pads share a name; then routed paths per layer and width w, separated by ;. In a path a pad name is that pad's centre, name@x,y a point inside that pad or via, vN(x,y) a via of type N, cw(c..) or ccw(c..) an arc to the next point about the centre after c; other vN are vias at no path point)
+5V: Cff1.1 Cic.1 Cin2.1 Cinx2.1 Cout1.1 GenSupply.1 GenSupply.2 IC2.6 IC2.7 IC2.15 IC3.5 L1.1 L2.1 LoudSpeaker.2 R18.1 Rfbt1.1 ServoSupply.2 TP18.TP? TP19.TP? TP21.TP? | length 89.6
  Top Layer w0.225: Cinx2.1@21.819,27.559 22.733,27.559 23.137,27.963 23.137,29.492 23.005,29.624 IC2.15@22.584,29.624
  Top Layer w0.25: IC2.6@21.734,29.436 21.734,28.752 21.971,28.515 ; Cinx2.1@21.819,27.559 21.971,27.711 21.971,28.515 ; IC2.7@22.234,29.448 22.234,28.778 21.971,28.515 ; 35.433,23.368 35.433,23.495 ; 36.853,24.915 37.061,24.915 37.084,24.892
  Top Layer w0.4: v2(25.469,47.387) 25.866,46.99 31.75,46.99 33.655,45.085 33.655,40.989 33.579,40.913 v2(33.579,36.79)
  Top Layer w0.5: Cinx2.1@21.819,27.559 21.835,27.543 21.835,24.908 Cin2.1@21.851,24.892 21.859,24.884 21.859,23.376 TP21.TP?@21.867,23.368
  Top Layer w0.6: v1(41.806,4.318) 46.027,4.318 46.378,4.669 R18.1@46.378,6.318
  Bottom Layer w0.4: LoudSpeaker.2@7.516,28.448 4.214,31.75 4.214,46.101 5.5,47.387 v2(25.469,47.387) ; IC3.5@33.485,34.143 33.576,34.234 Cic.1@33.576,35.814 ; Cic.1@33.579,35.83 33.577,35.831 33.577,36.789 v2(33.579,36.79)
  Bottom Layer w1.2: 5.205,19.306 4.064,20.447 4.064,24.996 LoudSpeaker.2@7.516,28.448
  other v1: 36.83,4.318 37.719,4.318 36.83,5.334 37.719,5.334 38.1,17.526 38.989,17.526 38.1,18.542 38.989,18.542 20.447,21.463 20.447,22.606
A_blue: LED.1 NT2.2 TP15.TP? | length 3.6
  Top Layer w0.3: NT2.2@44.473,31.369 45.589,31.369 45.716,31.242 TP15.TP?@45.743,31.242 ; 45.99,31.022 LED.1@48.282,31.022
A_green: LED.3 NT1.1 TP11.TP? | length 4.3
  Top Layer w0.5: NT1.1@44.219,28.448 45.362,28.448 TP11.TP?@45.743,28.829 45.77,28.829 45.863,28.922 LED.3@48.282,28.922
A_red: LED.2 R5.2 TP13.TP? | length 19.1
  Top Layer w0.3: R5.2@44.207,33.524 43.311,33.524 41.148,35.687 39.37,35.687 38.923,35.24 38.923,34.991 41.29,32.624 41.29,30.771 42.089,29.972 TP13.TP?@45.743,29.972 LED.2@48.282,29.972
ADC1: conuC.1 R1.1 R2.1 TP4.TP? | length 16.1
  Top Layer w0.6: conuC.1@7.516,44.069 9.802,46.355 TP4.TP?@19.431,46.355 R1.1@20.536,46.355 R2.1@20.536,44.196
COMP: Ccomp3.1 IC2.2 Rcomp2.2 TP26.TP? | length 6.1
  Top Layer w0.25: Rcomp2.2@20,37.338 20.089,37.249 TP26.TP?@20.089,36.195 20.129,36.155 20.129,35.218 Ccomp3.1@20.168,35.179 20.168,33.957 20.564,33.561 21.072,33.561 21.734,32.899 IC2.2@21.734,32.286
Enable: IC1.8 Q6.2 R16.1 TP32.TP? | length 25.8
  Top Layer w0.2: v4(36.301,16.129) 39.699,16.129 40.097,16.527 43.567,16.527 44.562,15.532 R16.1@44.562,14.732
  Top Layer w0.5: TP32.TP?@44.473,12.854 44.473,14.643 R16.1@44.562,14.732 ; TP32.TP?@44.492,12.808 44.519,12.808 44.754,12.573 49.299,12.573 v2(50.061,13.335) ; v2(54.653,13.28) 54.688,13.28 55.461,12.507 Q6.2@55.461,11.26
  Bottom Layer w0.2: IC1.8@36.001,15.02 36.001,15.454 36.301,15.754 v4(36.301,16.129)
  Bottom Layer w0.5: v2(50.061,13.335) 50.116,13.28 v2(54.653,13.28)
GND: "Engine Supply.2" "Switch PMOS.1" +12V.1 Ccomp2.2 Ccomp3.2 Cic.2 Cin1.2 Cin2.2 Cinx1.2 Cinx2.2 Cout1.2 Cout2.2 Css1.2 Cvcc1.2 Cvcc2.2 D4.2 F1.2 F2.2 IC1.2 IC1.6 IC1.11 IC1.12 IC1.13 IC1.14 IC1.15 IC1.16 IC1.17 IC1.18 IC2.3 IC2.10 IC2.13 IC3.2 Q1.2 Q2.2 Q3.2 Q8.2 R2.2 R9.2 R10.2 R11.2 R15.2 R16.2 R19.2 R22.2 R31.2 Rfbb1.2 Rfbb2.1 Rmode1.2 Rtrip1.2 ServoSupply.1 | length 487.3
  Top Layer w0.2: Ccomp3.2@19.248,35.179 19.304,35.123 19.304,33.147 19.558,32.893 21.042,32.893 21.159,32.776 IC2.3@21.159,31.936 21.159,31.511 21.259,31.411 21.91,31.411 22.185,31.136 22.509,31.136 IC2.10@22.534,31.111 24.253,31.111 v4(24.638,31.496) ; Rfbb2.1@25.074,37.719 Rfbb2.1@25.148,37.645 ; v4(35.301,16.027) 35.707,15.621 37.221,15.621 37.338,15.504 37.338,11.43 36.074,10.166 v3(35.665,10.166) 35.665,8.051 v3(35.979,7.737) ; v3(52.913,35.113) 52.971,35.17 52.971,35.433 53.683,36.145 R11.2@53.683,36.195 ; Q3.2@57.413,30.033 55.819,30.033 55.118,30.734 55.118,34.036 55.433,34.351 Q2.2@56.241,34.351 56.533,34.351 v3(57.444,35.262)
  Top Layer w0.3: Cout2.2@17.168,32.719 17.248,32.639 19.151,32.639 19.327,32.463 19.327,31.687 19.503,31.511 IC2.13@20.434,31.511
  Top Layer w0.4: Ccomp3.2@19.248,35.179 19.248,35.961 19.014,36.195 16.025,36.195 15.513,36.707 15.513,37.319 v2(15.494,37.338) v2(15.494,39.624) 15.513,39.643 15.513,40.402 16.386,41.275 18.788,41.275 19.022,41.041 Ccomp2.2@19.022,39.878 20.216,39.878 20.724,40.386 20.724,41.385 20.699,41.41 v2(20.699,42.436) ; R2.2@22.136,44.196 22.136,42.963 21.61,42.436 v2(20.699,42.436) ; Cvcc2.2@24.534,34.074 26.713,34.074 26.947,34.308 26.947,37.358 26.713,37.592 25.201,37.592 Rfbb2.1@25.148,37.645 ; Rfbb2.1@25.074,37.719 25.074,39.044 v2(25.4,39.37) ; v2@25.4,39.397 25.4,39.794 24.935,40.259 22.609,40.259 22.375,40.493 22.375,41.529 21.612,42.291 21.487,42.417 20.718,42.417 v2(20.699,42.436) ; Q8.2@40.094,9.863 40.094,10.688 40.328,10.922 41.278,10.922 v2(43.33,10.922) ; D4.2@43.246,19.685 43.346,19.585 43.788,19.585 45.235,18.138 45.235,15.709 46.162,14.782 R16.2@46.162,14.732 49.622,14.732 v2(49.625,14.729)
  Top Layer w0.5: v1(2.921,33.528) v1@2.944,33.551 ; +12V.1@7.516,33.735 3.128,33.735 v1@2.944,33.551 ; v2(11.43,23.749) 14.097,26.416 19.851,26.416 ; Cin2.2@19.851,24.892 19.851,26.416 ; Cinx2.2@20.899,27.559 20.085,27.559 19.851,27.325 19.851,26.416 ; 28.932,49.403 28.588,49.747 25.701,49.747 24.604,50.844 15.307,50.844 15.263,50.8 10.037,50.8 9.993,50.844 4.766,50.844 2.944,49.022 v1@2.944,33.551 ; v2@49.714,20.32 R10.2@52.309,20.32 ; R31.2@52.616,4.953 54.405,4.953 54.991,4.367 54.991,1.143 v1(54.864,1.016) ; Q3.2@57.638,30.033 57.413,30.033 56.656,29.276 56.656,28.462 56.388,28.194 56.388,27.306 53.969,24.887 Q1.2@53.744,24.887 53.519,24.887 52.67,24.038 52.67,23.531 52.309,23.17 R10.2@52.309,20.32 ; F2.2@66.802,44.109 66.969,43.942 70.28,43.942 70.866,43.356 v1(70.866,42.672) v1(70.866,39.243) v1(70.866,36.703) v1(70.866,33.655) v1(70.866,30.861) v1(70.866,27.559) v1(70.866,24.384) v1(70.866,21.59) v1(70.866,19.304) v1(70.866,16.891) 70.866,16.026 66.346,11.505 ; v1@2.944,33.551 2.944,5.275 3.793,4.426 5.761,4.426 7.313,2.874 ServoSupply.1@7.516,2.874 9.374,1.016 v1(44.196,1.016) v1(46.863,1.016) v1(49.53,1.016) v1(52.197,1.016) v1(54.864,1.016) ; R10.2@52.309,20.32 52.347,20.282 52.347,19.782 53.295,18.834 R15.2@56.411,18.834 62.724,18.834 66.346,15.212 66.346,11.505 ; v1(54.864,1.016) 55.856,1.016 62.333,7.493 66.346,11.505
  Top Layer w0.6: Q3.2@57.638,30.033 58.763,30.033 58.852,29.944 59.817,29.944 R9.2@59.967,29.794
  Top Layer w2: F1.2@50.823,44.109 F2.2@66.802,44.109
  Bottom Layer w0.2: Rmode1.2@23.063,17.78 22.987,17.704 22.987,16.637 23.241,16.383 26.797,16.383 27.305,16.891 Rtrip1.2@31.988,16.891 ; v4(24.638,31.496) 24.638,32.641 24.922,32.925 32.844,32.925 ; Rtrip1.2@32,16.891 Rtrip1.2@31.988,16.891 ; IC3.2@32.535,31.135 32.535,32.616 32.844,32.925 ; IC1.18@33.601,12.32 33.601,11.357 33.655,11.303 ; IC1.2@33.601,15.02 33.601,16.162 33.422,16.341 32.537,16.341 Rtrip1.2@31.988,16.891 ; IC1.17@34.001,12.32 34.001,11.338 34.036,11.303 ; IC1.16@34.401,12.32 34.401,11.547 34.518,11.43 34.801,11.43 ; Cic.2@34.496,35.814 34.496,33.042 34.379,32.925 32.844,32.925 ; Cvcc1.2@34.732,10.16 34.801,10.229 34.801,11.43 ; IC1.15@34.801,12.32 34.801,11.43 ; IC1.14@35.201,12.32 35.201,11.556 35.075,11.43 34.801,11.43 ; IC1.6@35.201,15.02 35.201,15.873 35.301,15.973 v4(35.301,16.027) ; 35.56,11.303 35.601,11.344 IC1.13@35.601,12.32 ; 35.941,11.303 36.001,11.363 IC1.12@36.001,12.32 ; v3(52.913,35.113) 53.063,35.262 v3(57.444,35.262)
  Bottom Layer w0.254: R19.2@53.213,45.117 R19.2@53.372,44.958 ; R22.2@70.136,45.085 R22.2@70.485,45.434
  Bottom Layer w0.3: IC1.11@36.501,12.32 36.501,11.251 36.576,11.176
  Bottom Layer w0.4: v2(20.699,42.436) 24.618,46.355 28.217,46.355 28.932,47.07 28.932,49.403 ; Rmode1.2@23.063,17.78 23.063,19.738 23.391,20.066 27.455,20.066 28.205,19.315 ; Rfbb1.2@30.914,19.558 28.448,19.558 28.205,19.315 ; Css1.2@32.075,18.051 32.062,18.051 31.952,18.161 29.36,18.161 28.205,19.315 ; Cout1.2@33.932,5.385 34.059,5.512 34.059,7.239 34.567,7.747 43.584,7.747 45.362,9.525 45.362,10.033 44.473,10.922 v2(43.33,10.922) ; Cvcc1.2@34.732,10.16 v3@35.665,10.16 ; Cinx1.2@38.25,12.192 38.25,11.176 40.613,11.176 Cin1.2@40.917,10.872 43.28,10.872 v2(43.33,10.922) ; v2(49.714,20.326) 49.625,20.236 v2(49.625,14.729) 49.426,14.53 49.426,13.739 49.276,13.589 49.276,11.664 49.042,11.43 43.838,11.43 v2(43.33,10.922)
  Bottom Layer w0.5: v2(11.43,23.749) 10.541,23.749 10.109,24.181 9.644,24.646 9.644,28.964 7.366,31.242 6.031,31.242 5.738,31.535 5.738,36.283 6.031,36.576 9.421,36.576 15.009,42.164 20.427,42.164 v2(20.699,42.436)
  other v1: 2.921,5.969 2.921,8.763 2.921,11.303 2.921,13.335 2.921,15.748 2.921,18.796 2.921,27.559 2.921,30.607
IShunt: conuC.2 IC3.1 TP37.TP? | length 43.5
  Top Layer w0.6: conuC.2@7.516,49.069 22.686,49.069 31.496,40.259 31.496,36.322 32.131,35.687 v2(35.687,35.687)
  Bottom Layer w0.6: IC3.1@33.485,31.643 33.485,31.085 33.836,30.734 TP37.TP?@35.052,30.734 35.687,31.369 v2(35.687,35.687)
K_blue: LED.6 Q2.3 TP14.TP? | length 4.9
  Top Layer w0.5: LED.6@51.332,31.022 53.429,31.022 53.463,30.988 53.49,30.988 53.509,31.007 53.583,31.007 53.94,31.364 53.94,33.351 53.99,33.401 Q2.3@54.041,33.401
K_green: LED.4 NT3.1 Q1.3 TP10.TP? | length 9.1
  Top Layer w0.5: LED.4@51.332,28.922 53.37,28.922 53.463,28.829 TP10.TP?@53.49,28.829 53.49,27.09 53.197,26.797 51.839,26.797 NT3.1@51.712,26.67 ; Q1.3@51.544,23.937 51.508,23.937 51.458,23.987 51.458,24.892 51.712,25.146 NT3.1@51.712,26.67 ; NT3.1@51.585,26.543 NT3.1@51.712,26.67 ; NT3.1@51.712,26.797 NT3.1@51.712,26.67
K_red: LED.5 Q3.3 TP12.TP? | length 4.5
  Top Layer w0.5: LED.5@51.332,29.972 TP12.TP?@53.49,29.972 54.379,29.083 Q3.3@55.438,29.083
NetBatt1_1: Batt1.1 F1.1
NetBatt2_1: Batt2.1 F2.1
NetCboot1_1: Cboot1.1 IC1.1 | length 2
  Bottom Layer w0.3: 31.877,15.875 32.925,15.875 33.101,15.699 IC1.1@33.101,15.02
NetCboot1_2: Cboot1.2 IC1.20 L1.2 TP17.TP? | length 1.8
  Bottom Layer w0.3: 31.75,13.335 31.785,13.37 IC1.20@33.551,13.37
NetCbst2_2: Cbst2.2 IC2.8 | length 2.4
  Top Layer w0.25: IC2.8@22.534,30.111 24.261,30.111 24.407,29.965 Cbst2.2@24.407,29.543